# Altium PCB PCB1.PcbDoc
Units mil, origin at the board's own origin, x right, y up, seen from the top; angles counter-clockwise.
Board outline 1425 x 2630 mil, 2 copper layers (Top Layer, Bottom Layer); 5 components, 11 nets, 55 pads, 0 vias.
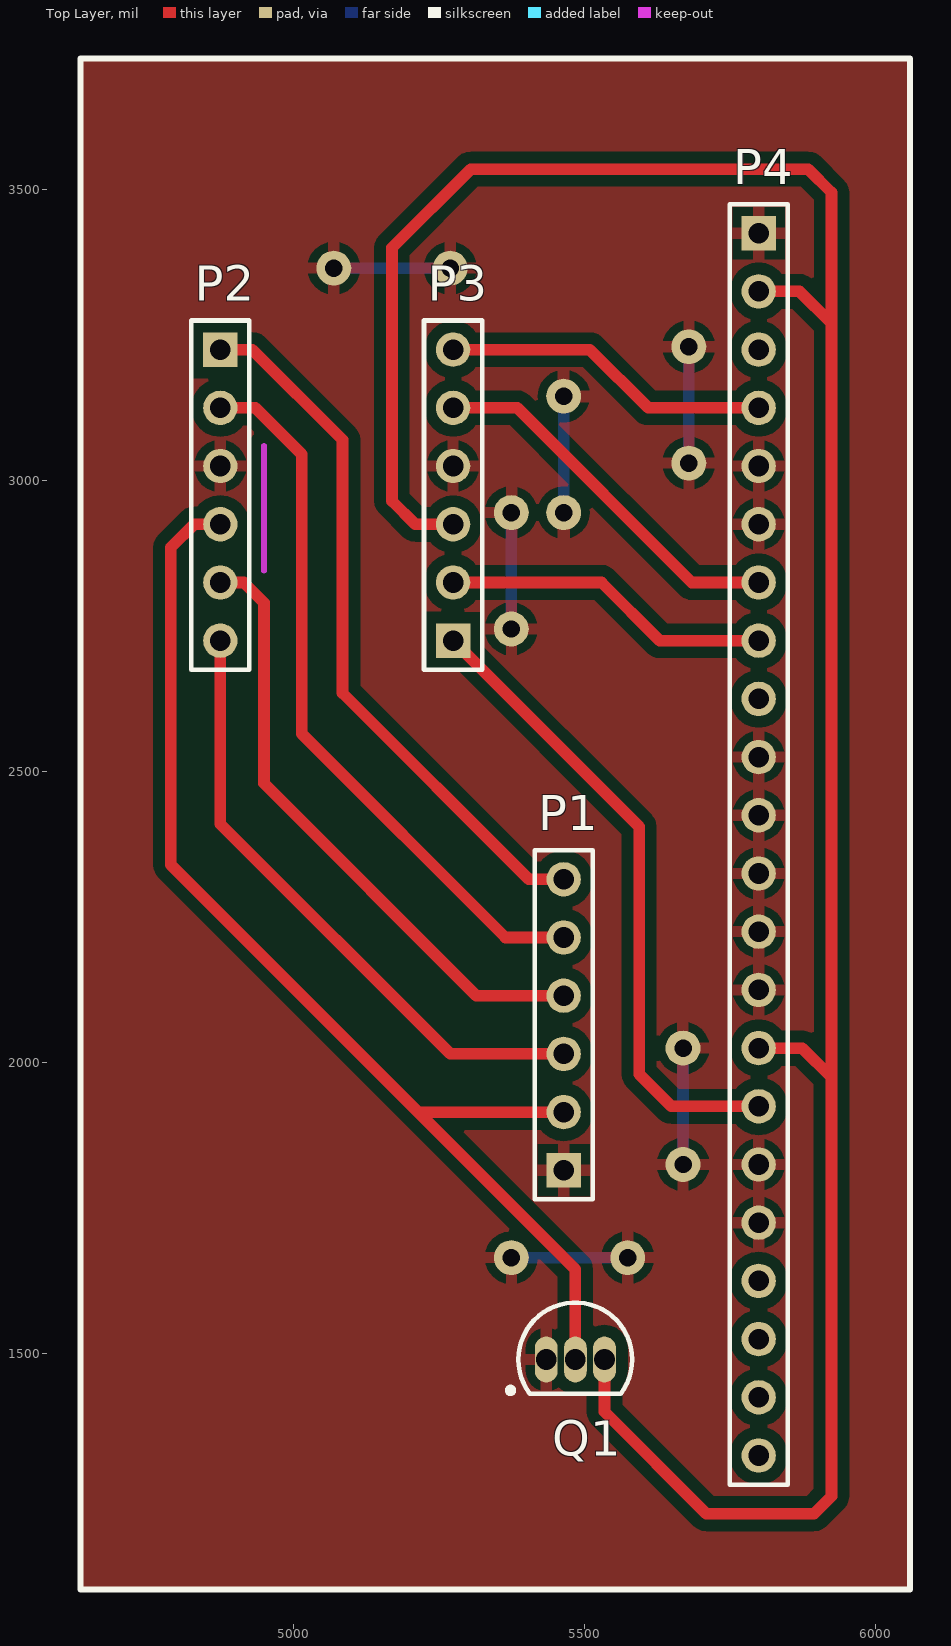
[diagram p0: Top Layer view]
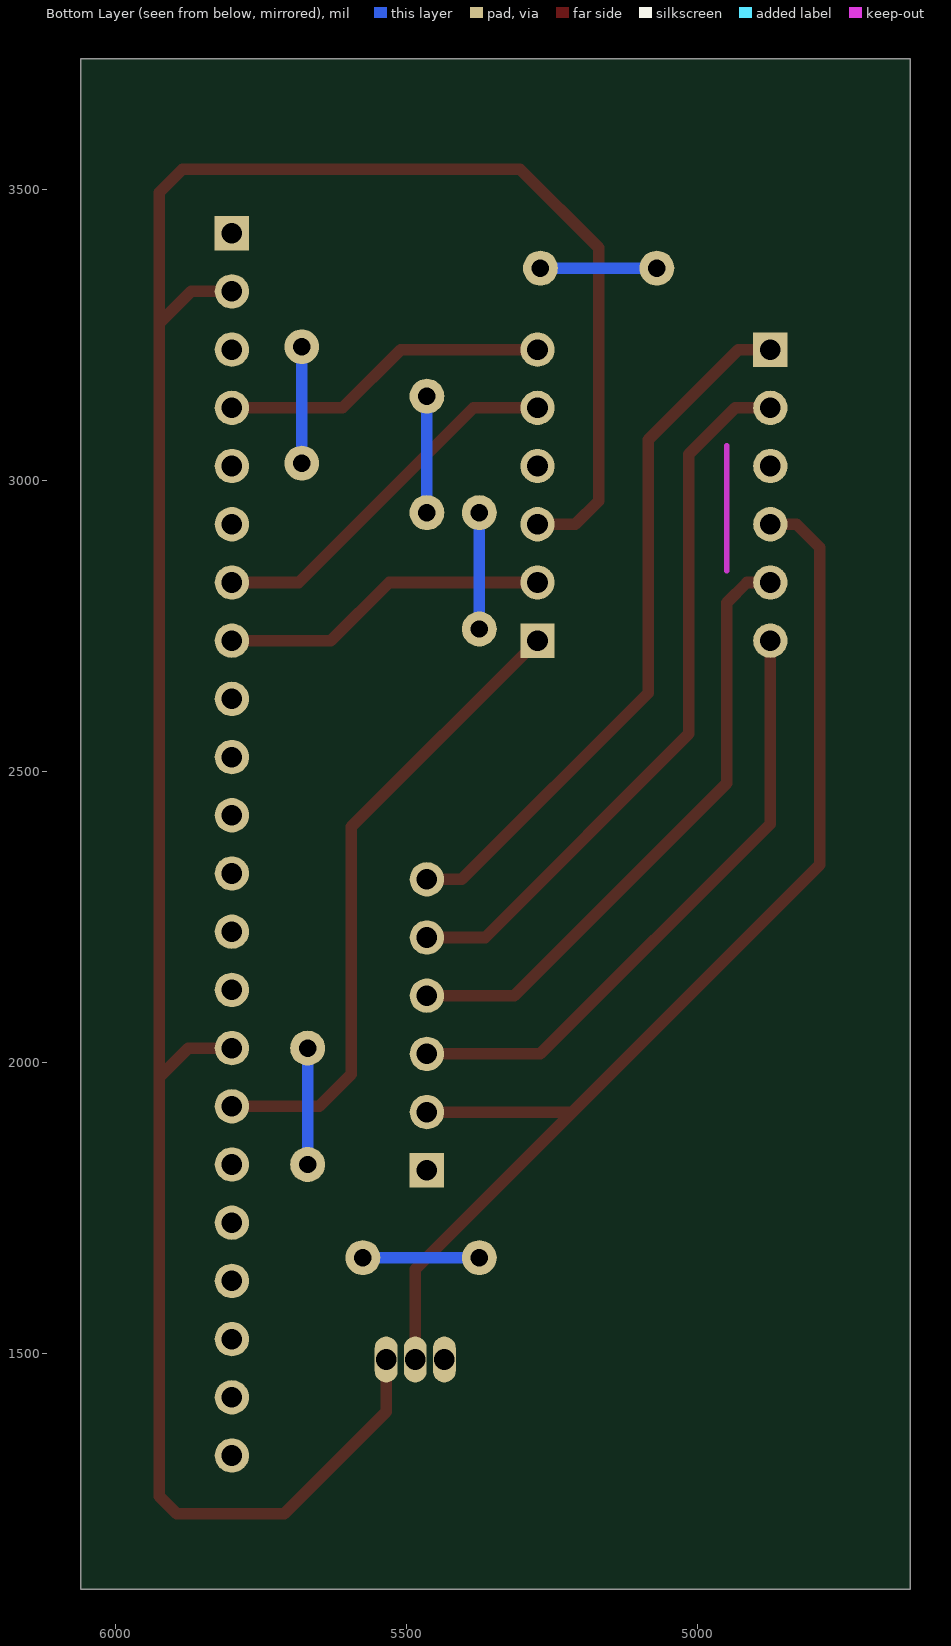
[diagram p1: Bottom Layer view, seen from below]

## Layer stack, top to bottom
Top Layer: signal copper 1.4
Dielectric: dielectric 12.6, FR-4, Dk 4.8
Bottom Layer: signal copper 1.4

## Board outline
4635,1095 4635,3725 6060,3725 6060,1095

## Design rules (kind name [scope] priority, off if disabled: settings)
Clearance [All] p1: gap=20
PolygonConnect [All] p1: connectstyle=Relief reliefconductorwidth=20 reliefentries=4 polygonreliefangle="90 Angle" airgapwidth=15
RoutingVias [All] p1: holewidth=28 width=50 viastyle="Through Hole" minholewidth=28 minwidth=50 maxholewidth=28 maxwidth=50
SolderMaskExpansion [All] p1: expansion=4
Width [All] p1: maxlimit=20 minlimit=20 preferedwidth=20
28 further rules are at their usual default settings.

## Components (designator, comment, footprint, x,y, rotation, side; value= is the part's Value field where it differs from the comment)
P1 "Header 6" HDR1X6 5465,1815 r90 top
P2 "Header 6" HDR1X6 4875,3225 r270 top
P3 "Header 6" HDR1X6 5275,2725 r90 top
P4 "Header 22" HDR1X22 5800,3425 r270 top
Q1 "MCP1700" TO-92A 5485,1490 r270 top

## Footprints (in the part's own frame and the unit in brackets; to place one, negate y for a bottom-side part, rotate by r counter-clockwise, add the part's x,y. Pads: shape width x height; smd on the part's side, far side on the other; paste and mask are expansions set on the pad)
HDR1X6 [mm] "Connector; Header; 6 Position"
  rect 1.5x1.5 hole 0.9: 1(0,0)
  round 1.5 hole 0.9: 2(2.54,0) 3(5.08,0) 4(7.62,0) 5(10.16,0) 6(12.7,0)
  silkscreen extent -1.27,-1.27 13.97,1.27
HDR1X22 [mm] "Connector; Header; 22 Position"
  rect 1.5x1.5 hole 0.9: 1(0,0)
  round 1.5 hole 0.9: 2(2.54,0) 3(5.08,0) 4(7.62,0) 5(10.16,0) 6(12.7,0) 7(15.24,0) 8(17.78,0) 9(20.32,0) 10(22.86,0) 11(25.4,0) 12(27.94,0) 13(30.48,0) 14(33.02,0) 15(35.56,0) 16(38.1,0) 17(40.64,0) 18(43.18,0) 19(45.72,0) 20(48.26,0) 21(50.8,0) 22(53.34,0)
  silkscreen extent -1.27,-1.27 54.61,1.27
TO-92A [mm] "TO, Flat Index; 3 In-Line, Axial Leads; Body Dia. 4.5mm; Leads 0.51 x 0.48 mm (max)"
  oval 2x1 hole 0.9: 1(0,-1.27) 2(0,0) 3(0,1.27)
  silkscreen extent -2.48,-2.95 1.5,2.48, body extent -2.5,-2.5 1.5,2.5, height 6.86

## Part data
P1 P2 P3: "Header, 6-Pin"
P4: "Header, 22-Pin"
Q1: library part 2N3904, "NPN General Purpose Amplifier"

## Free pads (board coordinates)
  round 60 hole 30: 0(5680,3230) 1(5680,3030) 2(5465,3145) 3(5465,2945) 4(5375,2945) 5(5375,2745) 6(5270,3365) 7(5070,3365) 8(5670,2025) 9(5670,1825) 10(5575,1665) 11(5375,1665)

## Nets (pads, with @x,y where several pads share a name; then routed paths per layer and width w, separated by ;. In a path a pad name is that pad's centre, name@x,y a point inside that pad or via, vN(x,y) a via of type N, cw(c..) or ccw(c..) an arc to the next point about the centre after c; other vN are vias at no path point)
3.3V: P3.3 P4.2 P4.15 Q1.3 | length 4482.5
  Top Layer w20: P3.3 5210,2925 5170,2965 5170,3400 5305,3535 5885,3535 5925,3495 5925,3270 ; Q1.3 5535,1400 5710,1225 5895,1225 5925,1255 5925,1975 ; P4.15 5875,2025 5925,1975 ; P4.2 5870,3325 5925,3270 ; 5925,1975 5925,3270
GND: P1.1 P2.3 P3.4 P4.1 P4.5 P4.6 P4.10 P4.11 P4.12 P4.13 P4.14 P4.17 P4.18 pad.0 pad.1 pad.2 pad.3 pad.4 pad.5 pad.6 pad.7 pad.8 pad.9 pad.10 pad.11 Q1.1 | length 1195
  Bottom Layer w20: pad.7 pad.6 ; pad.11 pad.10 ; pad.5 pad.4 ; pad.3 pad.2 ; pad.9 pad.8 ; pad.1@5680,3035 pad.0
NetP1_3: P1.3 P2.6 | length 1068.6
  Top Layer w20: P2.6 4875,2410 5270,2015 P1.3
NetP1_4: P1.4 P2.5 | length 1065.7
  Top Layer w20: P2.5 4915,2825 4950,2790 4950,2480 5315,2115 P1.4
NetP1_5: P1.5 P2.2 | length 1248.1
  Top Layer w20: P2.2 4935,3125 5015,3045 5015,2565 5365,2215 P1.5
NetP1_6: P1.6 P2.1 | length 1221.8
  Top Layer w20: P2.1 4930,3225 5085,3070 5085,2635 5405,2315 P1.6
NetP3_1: P3.1 P4.16 | length 1105.3
  Top Layer w20: P3.1 5595,2405 5595,1980 5650,1925 P4.16
NetP3_2: P3.2 P4.8 | length 566.4
  Top Layer w20: P3.2 5530,2825 5630,2725 P4.8
NetP3_5: P3.5 P4.7 | length 649.3
  Top Layer w20: P3.5 5385,3125 5685,2825 P4.7
NetP3_6: P3.6 P4.4 | length 566.4
  Top Layer w20: P3.6 5510,3225 5610,3125 P4.4
VCC: P1.2 P2.4 Q1.2 | length 2034.4
  Top Layer w20: P2.4 4830,2925 4790,2885 4790,2340 5215,1915 ; P1.2 5215,1915 ; Q1.2 5485,1645 5215,1915
pads on no net: P4.3 P4.9 P4.19 P4.20 P4.21 P4.22

## Polygon pours and split planes (outlines as drawn)
GND on Top Layer "Top Layer-No Net" (solid, remove dead copper, pour order 2): 4635,3725 6060,3725 6060,1095 4635,1095

## Keep-outs
Keep-Out Layer:
  lines w10: 4950,2845 4950,3060

## Silkscreen, mask and mechanical layers (free items; w line width, h text height)
Top Overlay:
  the board outline again, w10